# Altium PCB radxa_cm3_io_board_v1360_pcb_layout.PcbDoc (part 7 of 7)
Units mil, origin at the board's own origin, x right, y up, seen from the top; angles counter-clockwise.
Board outline 6299.61 x 3544.09 mil, 4 copper layers (Top, GND, Power, Bottom), stack 35.4 mil thick; 513 components, 397 nets, 1855 pads, 2695 vias.
Unrouted connection lines stored in the file: 280.
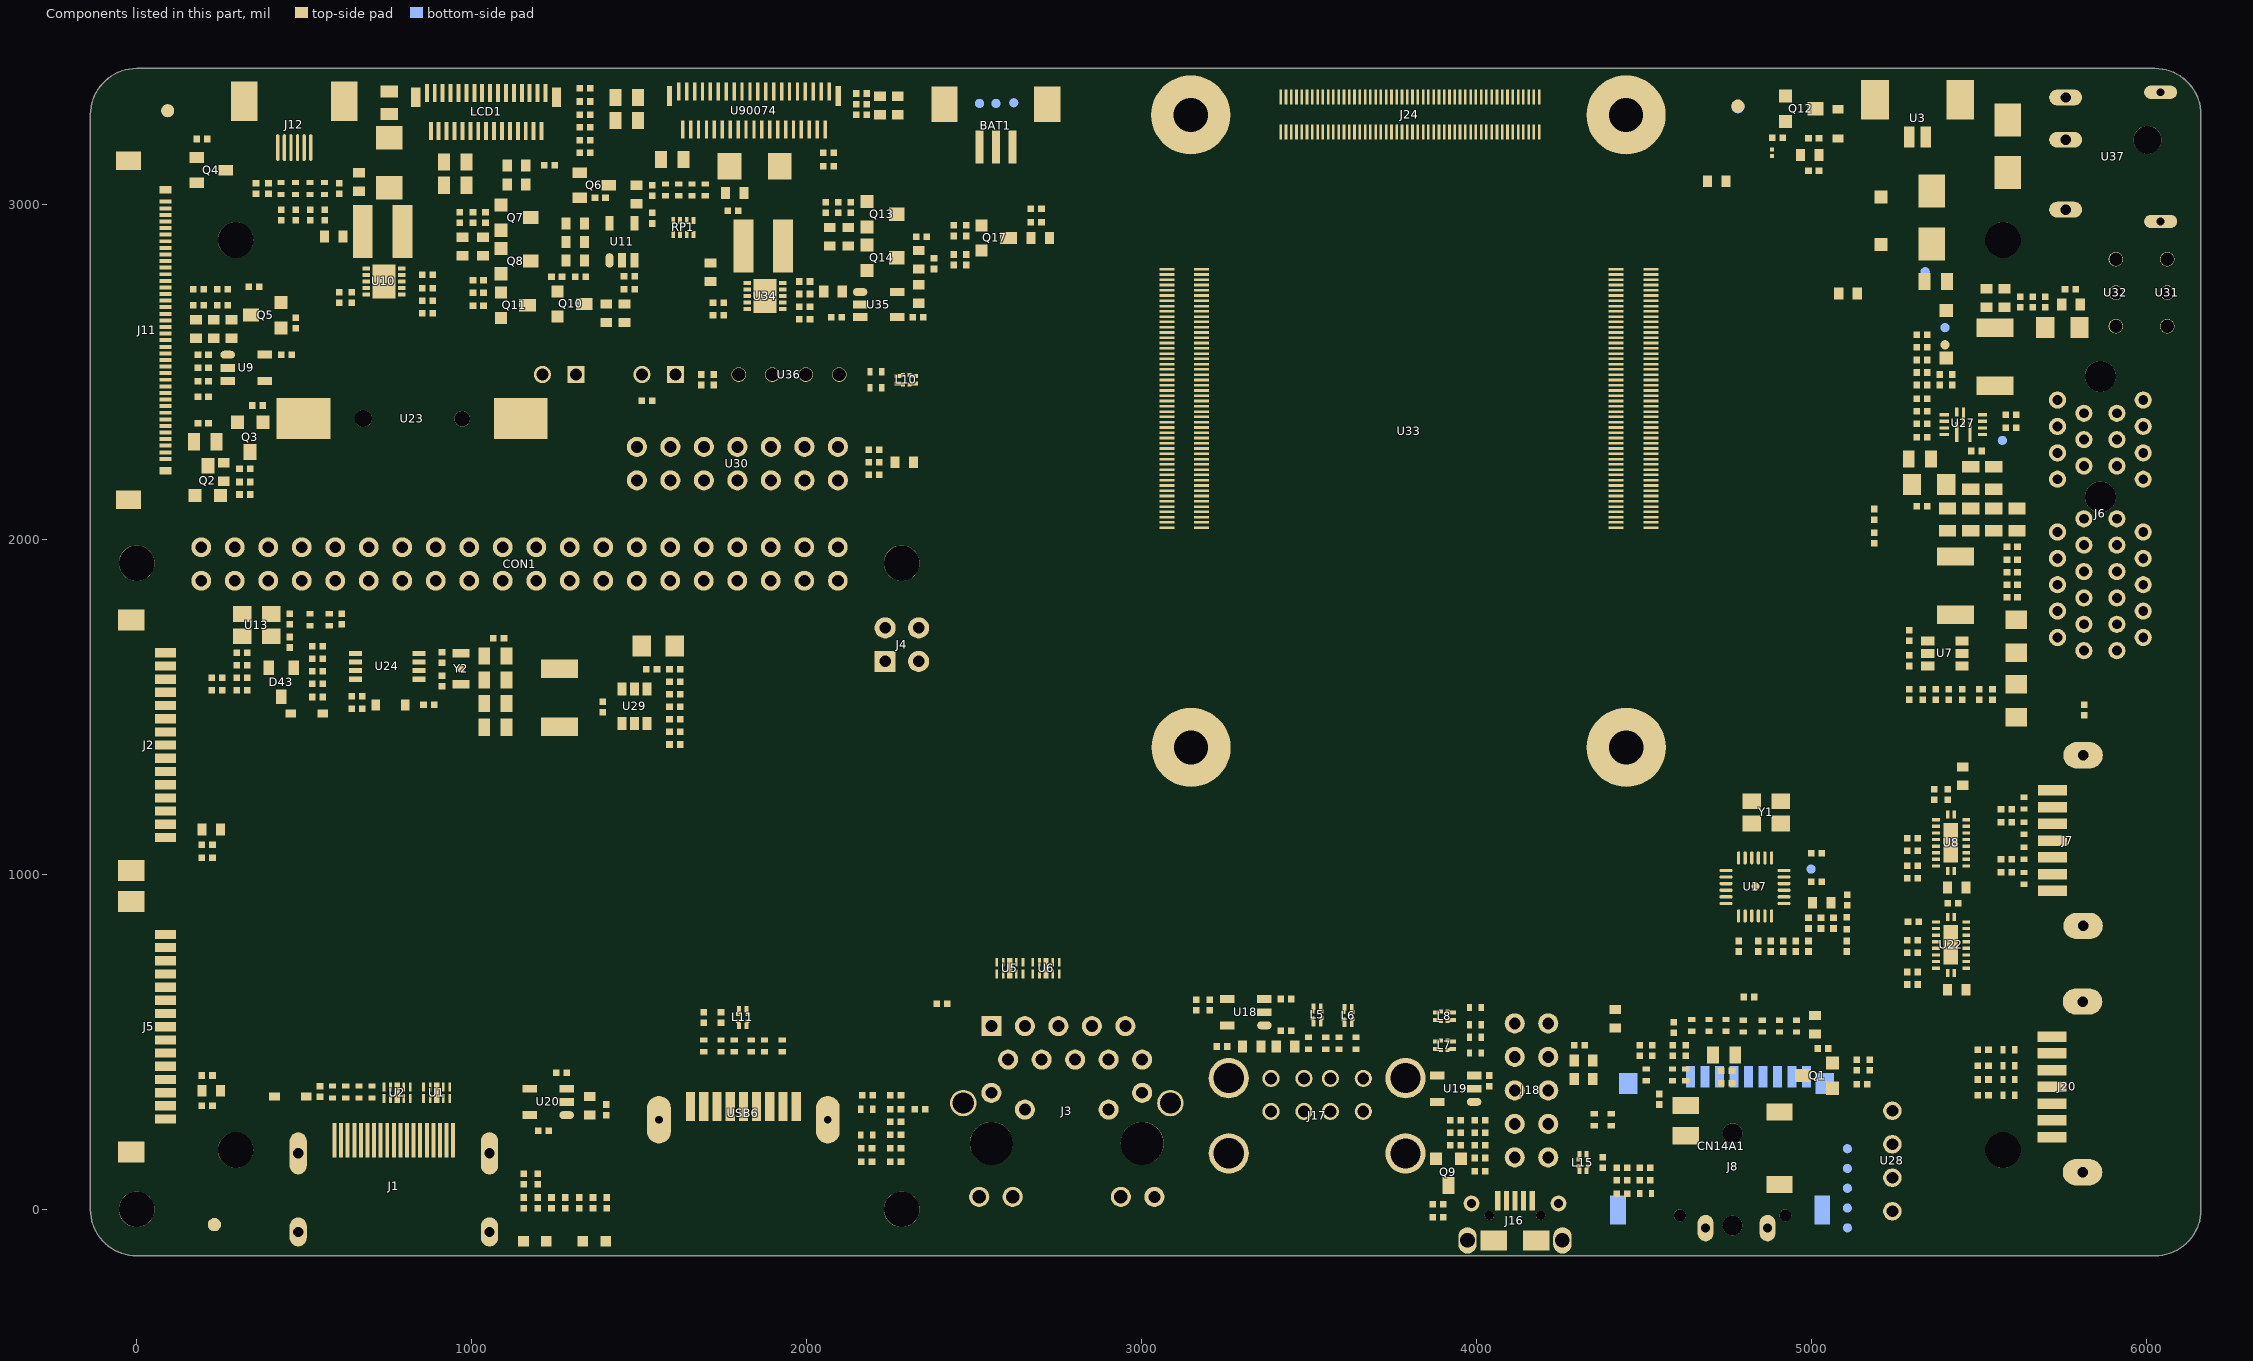
[diagram p9: the components of this part, seen from the top]

## Keep-outs
Top:
  region: 5767.72,1039.37 5757.87,1039.37 5757.87,1009.84 5767.72,1009.84 5767.72,1039.37
  region: 5444.88,2653.54 5647.64,2653.54 5647.64,2409.45 5444.88,2409.45 5444.88,2653.54
  region: 3202.76,2659.45 3218.5,2659.45 3218.5,2496.06 3202.76,2496.06 3202.76,2659.45
  region: 2293.31,2887.8 2395.67,2887.8 2395.67,2903.54 2293.31,2903.54 2293.31,2887.8
  region: 496.06,1706.69 600.39,1706.69 600.39,1698.82 496.06,1698.82 496.06,1706.69
  region: 2653.54,3043.31 2665.35,3043.31 2665.35,2984.25 2653.54,2984.25 2653.54,3043.31
  region: 5466.54,387.8 5476.38,387.8 5476.38,338.58 5466.54,338.58 5466.54,387.8
  region: 1159.45,2856.3 1124.02,2856.3 1124.02,2838.58 1159.45,2838.58 1159.45,2856.3
  region: 1742.13,2998.03 1730.31,2998.03 1730.31,2948.82 1742.13,2948.82 1742.13,2998.03
  region: 5533.46,1043.31 5539.37,1043.31 5539.37,1003.94 5533.46,1003.94 5533.46,1043.31
  region: 1590.55,2946.85 1669.29,2946.85 1669.29,2901.57 1590.55,2901.57 1590.55,2946.85
  region: 277.56,2683.07 320.87,2683.07 320.87,2694.88 277.56,2694.88 277.56,2683.07
  region: 2025.59,2763.78 2011.81,2763.78 2011.81,2665.35 2025.59,2665.35 2025.59,2763.78
  region: 5372.05,1610.24 5364.17,1610.24 5364.17,1564.96 5372.05,1564.96 5372.05,1610.24
  region: 5537.4,1149.61 5629.92,1149.61 5629.92,1139.76 5537.4,1139.76 5537.4,1149.61
  region: 2614.17,3297.24 2480.31,3297.24 2480.31,3279.53 2614.17,3279.53 2614.17,3297.24
  region: 1602.36,2998.03 1696.85,2998.03 1696.85,2980.31 1602.36,2980.31 1602.36,2998.03
  region: 5767.72,1185.04 5757.87,1185.04 5757.87,1159.45 5767.72,1159.45 5767.72,1185.04
  region: 5537.4,2299.21 5582.68,2299.21 5582.68,2303.15 5537.4,2303.15 5537.4,2299.21
  region: 899.61,2783.46 887.8,2783.46 887.8,2759.84 899.61,2759.84 899.61,2783.46
  region: 5332.68,2295.28 5328.74,2295.28 5328.74,2269.68 5332.68,2269.68 5332.68,2295.28
  region: 5295.28,1124.02 5344.49,1124.02 5344.49,1092.52 5295.28,1092.52 5295.28,1124.02
  region: 1291.34,51.18 1352.36,51.18 1352.36,39.37 1291.34,39.37 1291.34,51.18
  region: 4360.24,2096.46 4356.3,2096.46 4356.3,2062.99 4360.24,2062.99 4360.24,2096.46
  region: 4370.08,1659.45 4413.39,1659.45 4413.39,1651.57 4370.08,1651.57 4370.08,1659.45
  region: 198.82,1374.02 911.42,1374.02 911.42,1259.84 198.82,1259.84 198.82,1374.02
  region: 5330.71,2289.37 5411.42,2289.37 5411.42,2293.31 5330.71,2293.31 5330.71,2289.37
  region: 5543.31,505.91 5543.31,484.25 5533.46,484.25 5533.46,505.91 5543.31,505.91
  region: 283.46,1639.76 324.8,1639.76 324.8,1651.57 283.46,1651.57 283.46,1639.76
  region: 5354.33,2507.87 5446.85,2507.87 5446.85,2488.19 5354.33,2488.19 5354.33,2507.87
  region: 62.99,2395.67 110.24,2395.67 110.24,2187.01 62.99,2187.01 62.99,2395.67
  region: 1812.99,3053.15 1960.63,3053.15 1960.63,2791.34 1812.99,2791.34 1812.99,3053.15
  region: 2976.38,2190.94 2980.31,2190.94 2980.31,2157.48 2976.38,2157.48 2976.38,2190.94
  region: 1427.17,2683.07 1421.26,2683.07 1421.26,2618.11 1427.17,2618.11 1427.17,2683.07
  region: 2017.72,3033.46 2230.31,3033.46 2230.31,3017.72 2017.72,3017.72 2017.72,3033.46
  region: 5301.18,1064.96 5311.02,1064.96 5311.02,1007.87 5301.18,1007.87 5301.18,1064.96
  region: 1206.69,2814.96 1198.82,2814.96 1198.82,2795.28 1206.69,2795.28 1206.69,2814.96
  region: 5547.24,3021.65 5490.16,3021.65 5490.16,3029.53 5547.24,3029.53 5547.24,3021.65
  region: 5409.45,2372.05 5425.2,2372.05 5425.2,2326.77 5409.45,2326.77 5409.45,2372.05
  region: 5765.75,303.15 5761.81,303.15 5761.81,275.59 5765.75,275.59 5765.75,303.15
  region: 1767.72,2696.85 1730.31,2696.85 1730.31,2641.73 1767.72,2641.73 1767.72,2696.85
  region: 3045.28,2188.98 3039.37,2188.98 3039.37,2104.33 3045.28,2104.33 3045.28,2188.98
  region: 2297.24,332.68 2287.4,332.68 2287.4,309.06 2297.24,309.06 2297.24,332.68
  region: 5377.95,1531.5 5488.19,1531.5 5488.19,1547.24 5377.95,1547.24 5377.95,1531.5
  region: 1159.45,1641.73 1377.95,1641.73 1377.95,1409.45 1159.45,1409.45 1159.45,1641.73
  region: 437.01,2937.01 590.55,2937.01 590.55,2988.19 437.01,2988.19 437.01,2937.01
  region: 1775.59,3072.83 1781.5,3072.83 1781.5,3047.24 1775.59,3047.24 1775.59,3072.83
  region: 2633.86,767.72 2734.25,767.72 2734.25,781.5 2633.86,781.5 2633.86,767.72
  region: 5549.21,818.9 5541.34,818.9 5541.34,736.22 5549.21,736.22 5549.21,818.9
  region: 5354.33,1116.14 5344.49,1116.14 5344.49,1090.55 5354.33,1090.55 5354.33,1116.14
  region: 1200.79,350.39 1179.13,350.39 1179.13,297.24 1200.79,297.24 1200.79,350.39
  region: 2586.61,767.72 2635.83,767.72 2635.83,779.53 2586.61,779.53 2586.61,767.72
  region: 1291.34,3246.06 1387.8,3246.06 1387.8,3190.94 1291.34,3190.94 1291.34,3246.06
  region: 5295.28,972.44 5381.89,972.44 5381.89,974.41 5295.28,974.41 5295.28,972.44
  region: 1314.96,-9.84 1307.09,-9.84 1307.09,-39.37 1314.96,-39.37 1314.96,-9.84
  region: 3029.53,2710.63 3005.91,2710.63 3005.91,2588.58 3029.53,2588.58 3029.53,2710.63
  region: 692.91,354.33 746.06,354.33 746.06,350.39 692.91,350.39 692.91,354.33
  region: 159.45,2059.06 169.29,2059.06 169.29,1980.31 159.45,1980.31 159.45,2059.06
  region: 3202.76,2328.74 3210.63,2328.74 3210.63,2259.84 3202.76,2259.84 3202.76,2328.74
  region: 3165.35,474.41 3196.85,474.41 3196.85,468.5 3165.35,468.5 3165.35,474.41
  region: 1003.94,2712.6 1143.7,2712.6 1143.7,2728.35 1003.94,2728.35 1003.94,2712.6
  region: 3202.76,2188.98 3206.69,2188.98 3206.69,2161.42 3202.76,2161.42 3202.76,2188.98
  region: 2297.24,2858.27 2287.4,2858.27 2287.4,2897.64 2297.24,2897.64 2297.24,2858.27
  region: 6102.36,1568.9 6017.72,1568.9 6017.72,1553.15 6102.36,1553.15 6102.36,1568.9
  region: 944.88,1326.77 972.44,1326.77 972.44,1285.43 944.88,1285.43 944.88,1326.77
  region: 2759.84,3187.01 2771.65,3187.01 2771.65,3133.86 2759.84,3133.86 2759.84,3187.01
  region: 5301.18,740.16 5314.96,740.16 5314.96,679.13 5301.18,679.13 5301.18,740.16
  region: 769.69,397.64 923.23,397.64 923.23,419.29 769.69,419.29 769.69,397.64
  region: 2978.35,2179.13 3000,2179.13 3000,2169.29 2978.35,2169.29 2978.35,2179.13
  region: 1192.91,2675.2 1234.25,2675.2 1234.25,2681.1 1192.91,2681.1 1192.91,2675.2
  region: 3053.15,2661.42 3027.56,2661.42 3027.56,2566.93 3053.15,2566.93 3053.15,2661.42
  region: 490.16,2204.72 334.65,2204.72 334.65,2181.1 490.16,2181.1 490.16,2204.72
  region: 2812.99,3255.91 2832.68,3255.91 2832.68,3190.94 2812.99,3190.94 2812.99,3255.91
  region: 1000,1275.59 1023.62,1275.59 1023.62,1250 1000,1250 1000,1275.59
  region: 5728.35,2663.39 5767.72,2663.39 5767.72,2649.61 5728.35,2649.61 5728.35,2663.39
  region: 368.11,1757.87 375.98,1757.87 375.98,1732.28 368.11,1732.28 368.11,1757.87
  region: 5326.77,1970.47 5531.5,1970.47 5531.5,1753.94 5326.77,1753.94 5326.77,1970.47
  region: 448.82,1466.54 385.83,1466.54 385.83,1476.38 448.82,1476.38 448.82,1466.54
  region: 2472.44,1246.06 2460.63,1246.06 2460.63,1208.66 2472.44,1208.66 2472.44,1246.06
  region: 677.17,3055.12 783.46,3055.12 783.46,2840.55 677.17,2840.55 677.17,3055.12
  region: 309.06,2437.01 338.58,2437.01 338.58,2446.85 309.06,2446.85 309.06,2437.01
  region: 4234.25,1616.14 4250,1616.14 4250,1539.37 4234.25,1539.37 4234.25,1616.14
  region: 4377.95,897.64 4417.32,897.64 4417.32,885.83 4377.95,885.83 4377.95,897.64
  region: 161.42,1533.46 173.23,1533.46 173.23,1492.13 161.42,1492.13 161.42,1533.46
  region: 2938.98,1.97 3043.31,1.97 3043.31,17.72 2938.98,17.72 2938.98,1.97
  region: 1307.09,3344.49 1338.58,3344.49 1338.58,3303.15 1307.09,3303.15 1307.09,3344.49
  region: 210.63,1576.77 208.66,1576.77 208.66,1553.15 210.63,1553.15 210.63,1576.77
  region: 2141.73,2852.36 2251.97,2852.36 2251.97,2864.17 2141.73,2864.17 2141.73,2852.36
  region: 5767.72,456.69 5763.78,456.69 5763.78,425.2 5767.72,425.2 5767.72,456.69
  region: 5385.83,2257.87 5389.76,2257.87 5389.76,2295.28 5385.83,2295.28 5385.83,2257.87
  region: 3222.44,2757.87 3232.28,2757.87 3232.28,2486.22 3222.44,2486.22 3222.44,2757.87
  region: 273.62,2257.87 320.87,2257.87 320.87,2244.09 273.62,2244.09 273.62,2257.87
  region: 990.16,3305.12 1127.95,3305.12 1127.95,3246.06 990.16,3246.06 990.16,3305.12
  region: 401.57,2464.57 352.36,2464.57 352.36,2366.14 401.57,2366.14 401.57,2464.57
  region: 1848.43,3309.06 1992.13,3309.06 1992.13,3250 1848.43,3250 1848.43,3309.06
  region: 4545.28,328.74 4515.75,328.74 4515.75,338.58 4545.28,338.58 4545.28,328.74
  region: 968.5,1259.84 996.06,1259.84 996.06,1232.28 968.5,1232.28 968.5,1259.84
  region: 5527.56,716.54 5553.15,716.54 5553.15,724.41 5527.56,724.41 5527.56,716.54
  region: 1066.93,500 1102.36,500 1102.36,515.75 1066.93,515.75 1066.93,500
  region: 1730.31,2716.54 1746.06,2716.54 1746.06,2687.01 1730.31,2687.01 1730.31,2716.54
  region: 2942.91,1169.29 2913.39,1169.29 2913.39,1175.2 2942.91,1175.2 2942.91,1169.29
  region: 5403.54,1161.42 5383.86,1161.42 5383.86,1165.35 5403.54,1165.35 5403.54,1161.42
  region: 3155.51,2066.93 3151.57,2066.93 3151.57,2094.49 3155.51,2094.49 3155.51,2066.93
  region: 2669.29,2970.47 2773.62,2970.47 2773.62,2980.31 2669.29,2980.31 2669.29,2970.47
  region: 5490.16,2372.05 5496.06,2372.05 5496.06,2309.06 5490.16,2309.06 5490.16,2372.05
Power:
  region: 1657.15,1500 ccw(c1645.67,1500) 1645.67,1511.48 ccw(c1645.67,1500) 1634.19,1500 ccw(c1645.67,1500) 1645.67,1488.52 ccw(c1645.67,1500)
  region: 3281.5,3377.95 3289.37,3377.95 3289.37,3354.33 3281.5,3354.33 3281.5,3377.95
  region: 3356.3,3301.18 3368.11,3301.18 3368.11,3242.13 3356.3,3242.13 3356.3,3301.18
  region: 5310.45,2305.12 ccw(c5297.24,2305.12) 5297.24,2318.32 ccw(c5297.24,2305.12) 5284.04,2305.12 ccw(c5297.24,2305.12) 5297.24,2291.91 ccw(c5297.24,2305.12)
Bottom:
  region: 2364.17,1627.95 2372.05,1627.95 2372.05,1734.25 2364.17,1734.25 2364.17,1627.95
  region: 5728.35,2718.5 5714.57,2718.5 5714.57,2683.07 5728.35,2683.07 5728.35,2718.5
  region: 74.8,2968.5 47.24,2968.5 47.24,2685.04 74.8,2685.04 74.8,2968.5
  region: 3486.22,1627.95 4165.35,1627.95 4165.35,1562.99 3486.22,1562.99 3486.22,1627.95
  region: 503.94,1614.17 500,1614.17 500,1637.8 503.94,1637.8 503.94,1614.17
  region: 4037.4,2948.82 4086.61,2948.82 4086.61,2954.72 4037.4,2954.72 4037.4,2948.82
  region: 5364.17,1045.28 5350.39,1045.28 5350.39,1155.51 5364.17,1155.51 5364.17,1045.28
  region: 5777.56,2714.57 5793.31,2714.57 5793.31,2669.29 5777.56,2669.29 5777.56,2714.57
  region: 1061.02,3078.74 2966.54,3078.74 2966.54,2862.2 1061.02,2862.2 1061.02,3078.74
  region: 1015.75,3259.84 1137.8,3259.84 1137.8,2996.06 1015.75,2996.06 1015.75,3259.84
  region: 956.69,3194.88 1009.84,3194.88 1009.84,3185.04 956.69,3185.04 956.69,3194.88
  region: 1905.51,3212.6 1964.57,3212.6 1964.57,3169.29 1905.51,3169.29 1905.51,3212.6
  region: 4275.59,3244.09 4305.12,3244.09 4305.12,3250 4275.59,3250 4275.59,3244.09
  region: 1356.3,2694.88 1370.08,2694.88 1370.08,2665.35 1356.3,2665.35 1356.3,2694.88
  region: 4488.19,2738.19 4549.21,2738.19 4549.21,2704.72 4488.19,2704.72 4488.19,2738.19
  region: 3675.2,2897.64 3921.26,2897.64 3921.26,2856.3 3675.2,2856.3 3675.2,2897.64
  region: 3820.87,769.68 3787.4,769.68 3787.4,775.59 3820.87,775.59 3820.87,769.68
  region: 4692.91,899.61 4714.57,899.61 4714.57,907.48 4692.91,907.48 4692.91,899.61
  region: 1988.19,3127.95 2919.29,3127.95 2919.29,3086.61 1988.19,3086.61 1988.19,3127.95
Keep-Out Layer:
  the board outline again, w3.94

## Other copper
Top:
  region net VCC12V_DCIN: 5326.77,2277.56 5171.26,2277.56 5171.26,2080.71 5326.77,2080.71 5326.77,2277.56
  region net VCC5V_P: 1464.57,2795.28 1403.54,2795.28 1403.54,2690.94 1464.57,2690.94 1464.57,2795.28
  region net BAT_3V7_LOSE: 3553.15,3261.81 3590.55,3261.81 3590.55,3342.52 3553.15,3342.52 3553.15,3261.81
  region net VCC12V_DCIN: 5322.83,2561.02 5265.75,2561.02 5265.75,2663.39 5322.83,2663.39 5322.83,2561.02
  region net VCC5V0_USB1: 3342.52,561.02 3425.2,561.02 3425.2,267.72 3342.52,267.72 3342.52,561.02
  region net +5V_INPUT: 5500,2706.69 5379.92,2706.69 5379.92,2647.64 5429.13,2647.64 5476.38,2600.39 5500,2600.39 5500,2706.69
  region net VCC5V_P: 1311.02,2685.04 1474.41,2685.04 1474.41,2716.54 1311.02,2716.54 1311.02,2685.04
  region net N17840574: 5318.9,2990.16 5456.69,2990.16 5523.62,3057.09 5523.62,3139.76 5610.24,3226.38 5807.09,3226.38 5807.09,3368.11 5525.59,3368.11 5492.13,3334.65 5492.13,3143.7 5318.9,3143.7 5318.9,2990.16
  region net VCC3V3_SYS: 2051.18,2891.73 2090.55,2891.73 2090.55,2803.15 2051.18,2803.15 2051.18,2891.73
  region net VCC5V_P: 1360.24,2822.83 1427.17,2822.83 1427.17,2692.91 1360.24,2692.91 1360.24,2822.83
  region net VCC3V3_SYS: 942.91,1167.32 968.5,1167.32 968.5,1127.95 942.91,1127.95 942.91,1167.32
  region net VCC3V3_SD_1: 4791.34,322.83 4748.03,322.83 4748.03,488.19 4791.34,488.19 4791.34,322.83
  region net BAT_3V7_LOSE: 2537.4,3289.37 2578.74,3289.37 2578.74,3120.08 2537.4,3120.08 2537.4,3289.37
  region net VCC12V: 228.35,2187.01 316.93,2187.01 316.93,2094.49 287.4,2064.96 228.35,2064.96 228.35,2187.01
  region net N17840574: 5543.31,3163.39 5625.98,3163.39 5716.54,3253.94 5716.54,3267.72 5543.31,3267.72 5543.31,3163.39
  region net VCC5V0_USB: 3234.25,474.41 3188.98,474.41 3188.98,604.33 3234.25,604.33 3234.25,474.41
  region net VCC3V3_SYS: 992.13,2860.24 950.79,2860.24 950.79,2791.34 992.13,2791.34 992.13,2860.24
  region net VCC5V0_USB: 2106.3,2803.15 2143.7,2803.15 2143.7,2889.76 2106.3,2889.76 2106.3,2803.15
  region net N18110264: 5108.27,417.32 5037.4,417.32 5037.4,539.37 5108.27,539.37 5108.27,417.32
  region net USB_5V_IN: 3466.54,3364.17 3425.2,3364.17 3425.2,3261.81 3466.54,3261.81 3466.54,3364.17
  region net VCC5V0_USB: 3931.1,253.94 3854.33,253.94 3854.33,336.61 3931.1,336.61 3931.1,253.94
  region net N19638712: 1379.92,1505.91 1462.6,1505.91 1462.6,1547.24 1379.92,1547.24 1379.92,1505.91
  region net N17923771: 594.49,3041.34 622.05,3041.34 635.83,3055.12 704.72,3055.12 704.72,2840.55 671.26,2840.55 663.39,2832.68 663.39,2801.18 669.29,2795.28 694.88,2795.28 694.88,2783.46 620.08,2783.46 594.49,2809.06 594.49,3041.34
  region net BAT_3V7_PLUS: 3505.91,3342.52 3543.31,3342.52 3543.31,3261.81 3505.91,3261.81 3505.91,3342.52
  region net +5V_INPUT: 4498.03,2716.54 4620.08,2716.54 4620.08,2629.92 4498.03,2629.92 4498.03,2716.54
  region net N19323495: 5458.66,2334.65 5446.85,2334.65 5446.85,2480.31 5458.66,2492.13 5639.76,2492.13 5639.76,2409.45 5484.25,2409.45 5458.66,2383.86 5458.66,2334.65
  region net VCC12V_LCD: 68.9,2324.8 108.27,2324.8 141.73,2358.27 192.91,2358.27 192.91,2257.87 198.82,2251.97 279.53,2251.97 279.53,2194.88 124.02,2194.88 116.14,2202.76 116.14,2246.06 108.27,2253.94 68.9,2253.94 68.9,2324.8
  region net VCC5V0_USB: 641.73,3078.74 685.04,3078.74 685.04,3145.67 641.73,3145.67 641.73,3078.74
  region net VCC3V3_SYS: 5070.87,2994.09 5116.14,2994.09 5116.14,3039.37 5070.87,3039.37 5070.87,2994.09
  region net VCC_LCD_MIPI: 1147.64,2938.98 1147.64,3147.64 1155.51,3155.51 1194.88,3155.51 1202.76,3163.39 1202.76,3248.03 1214.57,3259.84 1214.57,3360.24 1232.28,3360.24 1232.28,2938.98 1147.64,2938.98
  region net VCC5V0_USB2: 4053.15,336.61 3954.72,336.61 3954.72,309.06 3968.5,295.28 4023.62,295.28 4031.5,303.15 4053.15,303.15 4053.15,336.61
  region net +3V3: 4438.98,2677.17 4336.61,2677.17 4336.61,2698.82 4438.98,2698.82 4438.98,2677.17
  region net VCC_LEDK1: 942.91,3360.24 907.48,3360.24 907.48,3265.75 917.32,3255.91 917.32,3185.04 893.7,3161.42 893.7,3029.53 954.72,3029.53 954.72,3293.31 942.91,3305.12 942.91,3360.24
  region net VCC_1V8_1: 1318.9,2978.35 1423.23,2978.35 1423.23,2870.08 1318.9,2870.08 1318.9,2978.35
  region net 5V0_USB30: 1710.63,253.94 1679.13,253.94 1669.29,244.09 1635.83,244.09 1620.08,228.35 1620.08,188.98 1608.27,177.17 1541.34,177.17 1423.23,295.28 1366.14,295.28 1366.14,216.54 1399.61,216.54 1498.03,118.11 1671.26,118.11 1710.63,157.48 1710.63,253.94
  region net VCC3V3_SYS: 224.41,1907.48 159.45,1907.48 159.45,1854.33 131.89,1826.77 70.87,1826.77 55.12,1811.02 55.12,1765.75 165.35,1765.75 224.41,1824.8 224.41,1907.48
  region net VCC12V_DCIN: 5283.46,2261.81 5171.26,2261.81 5171.26,2933.07 5283.46,2933.07 5283.46,2261.81
  region net N17923199: 954.72,2925.2 1055.12,2925.2 1055.12,2885.83 954.72,2885.83 954.72,2925.2
  region net N17810979: 5785.43,1694.88 5838.58,1694.88 5838.58,1496.06 5785.43,1496.06 5785.43,1694.88
  region net VCC5V0_USB: 1149.61,202.76 1210.63,202.76 1210.63,295.28 1149.61,295.28 1149.61,202.76
  region net VCC12V: 5429.13,1673.23 5486.22,1673.23 5509.84,1696.85 5645.67,1696.85 5685.04,1736.22 5763.78,1736.22 5763.78,1539.37 5488.19,1539.37 5488.19,1631.89 5474.41,1645.67 5429.13,1645.67 5429.13,1673.23
  region net +5V_INPUT: 5490.16,2600.39 5724.41,2600.39 5724.41,2706.69 5490.16,2706.69 5490.16,2600.39
  region net VCC3V3_SD_1: 4757.87,488.19 5027.56,488.19 5027.56,379.92 4757.87,379.92 4757.87,488.19
  region net VCC3V3_SYS: 1084.65,1409.45 1366.14,1409.45 1366.14,1480.31 1084.65,1480.31 1084.65,1409.45
  region net USB_5V_IN: 4730.31,3051.18 4803.15,3051.18 4803.15,3106.3 4730.31,3106.3 4730.31,3051.18
  region net N17923199: 992.13,2954.72 1108.27,2954.72 1108.27,2901.57 992.13,2901.57 992.13,2954.72
  region net VCC_LEDA1: 895.67,3360.24 895.67,3263.78 883.86,3251.97 883.86,3163.39 694.88,3163.39 694.88,3287.4 805.12,3287.4 812.99,3279.53 852.36,3279.53 856.3,3283.46 856.3,3360.24 895.67,3360.24
  region net N17840574: 5318.9,3106.3 5318.9,3147.64 5374.02,3147.64 5374.02,3240.16 5488.19,3240.16 5500,3251.97 5513.78,3251.97 5513.78,3106.3 5318.9,3106.3
  region net N17813952: 5374.02,1803.15 5374.02,1683.07 5482.28,1683.07 5509.84,1710.63 5509.84,1803.15 5374.02,1803.15
  region net VCC12V_DCIN: 5352.36,2627.95 5261.81,2627.95 5261.81,2929.13 5352.36,2929.13 5352.36,2627.95
  region net VBUS: 4015.75,124.02 4070.87,124.02 4070.87,7.87 4015.75,7.87 4015.75,124.02
  region net VCC_LEDK2: 1462.6,3346.46 1462.6,3222.44 1515.75,3222.44 1515.75,3346.46 1462.6,3346.46
  region net N17929106: 1781.5,3053.15 1840.55,3053.15 1840.55,2929.13 1781.5,2929.13 1781.5,3053.15
  region net N17841777: 661.42,1543.31 726.38,1543.31 726.38,1484.25 661.42,1484.25 661.42,1543.31
  region net N17923777: 781.5,2783.46 832.68,2783.46 832.68,3084.65 714.57,3084.65 714.57,3013.78 761.81,2966.54 761.81,2840.55 781.5,2820.87 781.5,2783.46
  region net +5V_INPUT: 1500,1533.46 1472.44,1533.46 1472.44,1647.64 1466.54,1653.54 1403.54,1653.54 1403.54,1714.57 1535.43,1714.57 1535.43,1608.27 1500,1572.83 1500,1533.46
  region net VCC5V0_USB2: 4307.09,368.11 4255.91,368.11 4255.91,486.22 4218.5,523.62 4102.36,523.62 4082.68,543.31 4082.68,588.58 4232.28,588.58 4301.18,519.68 4301.18,474.41 4307.09,468.5 4307.09,368.11
  region net VCC3V3_SYS: 1084.65,1718.5 1159.45,1718.5 1159.45,1409.45 1084.65,1409.45 1084.65,1718.5
  region net 5V0_USB30: 1259.84,295.28 1259.84,216.54 1421.26,216.54 1423.23,214.57 1423.23,295.28 1259.84,295.28
  region net VCC3V3_SD_1: 5027.56,539.37 4990.16,539.37 4990.16,437.01 5027.56,437.01 5027.56,539.37
  region net +1V8: 4438.98,2708.66 4336.61,2708.66 4336.61,2730.31 4438.98,2730.31 4438.98,2708.66
  region net VCC3V3_LCD0: 303.15,2537.4 228.35,2537.4 228.35,2500 202.76,2500 202.76,2572.83 192.91,2582.68 131.89,2582.68 108.27,2606.3 70.87,2606.3 70.87,2681.1 125.98,2681.1 133.86,2673.23 133.86,2639.76 145.67,2627.95 303.15,2627.95 303.15,2537.4
  region net N17929106: 1694.88,2809.06 1767.72,2809.06 1777.56,2799.21 1777.56,2746.06 1783.46,2740.16 1832.68,2740.16 1832.68,2751.97 1809.06,2751.97 1803.15,2757.87 1803.15,2781.5 1811.02,2789.37 1840.55,2789.37 1840.55,3043.31 1781.5,3043.31 1781.5,2960.63 1775.59,2954.72 1706.69,2954.72 1694.88,2942.91 1694.88,2809.06
  region net VCC5V0_USB: 1015.75,2198.82 1163.39,2198.82 1163.39,2139.76 1015.75,2139.76 1015.75,2198.82
  region net VCC12V: 5438.98,2350.39 5427.17,2350.39 5427.17,2303.15 5391.73,2267.72 5391.73,2220.47 5372.05,2200.79 5372.05,2129.92 5435.04,2129.92 5435.04,2181.1 5442.91,2188.98 5586.61,2188.98 5586.61,2244.09 5496.06,2244.09 5486.22,2253.94 5486.22,2275.59 5456.69,2275.59 5438.98,2293.31 5438.98,2350.39
  region net GND: 3271.65,1450.79 3202.76,1450.79 3202.76,1312.99 3271.65,1312.99 3271.65,1450.79
  region net VCC5V0_USB: 5771.65,2598.43 5866.14,2598.43 5866.14,2757.87 5771.65,2757.87 5771.65,2598.43
  region net N17929067: 2051.18,2944.88 2200.79,2944.88 2200.79,2911.42 2051.18,2911.42 2051.18,2944.88
  region net VCC_LCD_MIPI_2: 2244.09,2950.79 2309.06,2950.79 2309.06,3281.5 2244.09,3281.5 2244.09,2950.79
  region net VBUS: 4482.28,570.87 4521.65,570.87 4521.65,519.68 4482.28,519.68 4482.28,570.87
  region net VCC3V3_LCD0: 104.33,2681.1 66.93,2681.1 66.93,2606.3 104.33,2606.3 104.33,2681.1
  region net VCC5V_P: 1318.9,2858.27 1427.17,2858.27 1427.17,2809.06 1318.9,2809.06 1318.9,2858.27
  region net VCC5V0_USB: 3188.98,604.33 3279.53,604.33 3279.53,535.43 3188.98,535.43 3188.98,604.33
  region net N19638712: 1462.6,1533.46 1206.69,1533.46 1206.69,1643.7 1462.6,1643.7 1462.6,1533.46
  region net VCC12V_DCIN: 5645.67,3143.7 5543.31,3143.7 5543.31,3027.56 5700.79,3027.56 5700.79,3088.58 5645.67,3143.7
  region net VCC5V_P: 2092.52,2763.78 2198.82,2763.78 2198.82,2722.44 2092.52,2722.44 2092.52,2763.78
  region net VCC5V0_USB: 1011.81,2860.24 1053.15,2860.24 1053.15,2791.34 1011.81,2791.34 1011.81,2860.24
  region net VCC5V0_USB: 1694.88,2785.43 1765.75,2785.43 1765.75,2744.09 1694.88,2744.09 1694.88,2785.43
  region net N17929109: 1919.29,2740.16 1919.29,2779.53 1907.48,2791.34 1895.67,2791.34 1895.67,2911.42 1850.39,2956.69 1850.39,3153.54 1960.63,3153.54 1960.63,2740.16 1919.29,2740.16
  region net VCC3V3_SYS: 90.55,1029.53 33.46,1029.53 33.46,956.69 90.55,956.69 90.55,1029.53
  region net BAT_3V7_PLUS: 2598.43,3291.34 2637.8,3291.34 2637.8,3122.05 2598.43,3122.05 2598.43,3291.34
  region net N19638714: 1375.98,1494.09 1462.6,1494.09 1462.6,1409.45 1375.98,1409.45 1375.98,1494.09
  region net N17929067: 2120.08,2978.35 2200.79,2978.35 2200.79,2911.42 2120.08,2911.42 2120.08,2978.35
  region net VCC5V0_USB: 1421.26,2663.39 1236.22,2663.39 1236.22,2625.98 1421.26,2625.98 1421.26,2663.39
  region net 5V0_USB30: 1710.63,352.36 1675.2,352.36 1675.2,224.41 1710.63,224.41 1710.63,352.36
  region net VCC_LEDA2: 1624.02,3364.17 1624.02,3285.43 1635.83,3273.62 1635.83,3190.94 1669.29,3157.48 1805.12,3157.48 1805.12,3074.8 1720.47,3074.8 1687.01,3108.27 1604.33,3108.27 1594.49,3118.11 1594.49,3267.72 1612.2,3285.43 1612.2,3364.17 1624.02,3364.17
  region net VCC3V3_PCIE: 5372.05,2051.18 5561.02,2051.18 5561.02,1921.26 5372.05,1921.26 5372.05,2051.18
  region net N17929067: 2082.68,2984.25 2143.7,2984.25 2143.7,2925.2 2082.68,2925.2 2082.68,2984.25
  region net VCC3V3_SYS: 440.94,2537.4 326.77,2537.4 326.77,2610.24 395.67,2610.24 409.45,2596.46 440.94,2596.46 440.94,2537.4
  region net VCC5V0_USB: 1236.22,2685.04 1303.15,2685.04 1303.15,2631.89 1236.22,2631.89 1236.22,2685.04
  region net VCC12V_DCIN: 5413.39,2933.07 5181.1,2933.07 5181.1,2812.99 5413.39,2812.99 5413.39,2933.07
  region net VCC_LCD_MIPI_2: 2273.62,3281.5 2074.8,3281.5 2074.8,3305.12 2059.06,3305.12 2059.06,3273.62 2096.46,3236.22 2228.35,3236.22 2263.78,3200.79 2273.62,3200.79 2273.62,3281.5
Power:
  region net USB_5V_IN: 4755.91,3122.05 4755.91,3049.21 4801.18,3049.21 4801.18,3122.05 4755.91,3122.05
  region net VCC5V0_USB: 1728.35,2767.72 1767.72,2767.72 1767.72,2746.06 1728.35,2746.06 1728.35,2767.72
  region net VCC12V: 5694.88,1748.03 5767.72,1748.03 5767.72,1665.35 5694.88,1665.35 5694.88,1748.03
  region net VCC5V0_USB: 159.45,2015.75 332.68,2015.75 332.68,1937.01 159.45,1937.01 159.45,2015.75
  region net VCC5V0_USB: 2106.3,2840.55 2145.67,2840.55 2145.67,2812.99 2106.3,2812.99 2106.3,2840.55
  region net BAT_3V7_LOSE: 2537.4,3275.59 2576.77,3275.59 2576.77,3248.03 2537.4,3248.03 2537.4,3275.59
Bottom:
  region net VCC5V0_USB: 1124.02,2177.17 1163.39,2177.17 1163.39,2147.64 1124.02,2147.64 1124.02,2177.17
  region net GND: 3273.62,3289.37 3273.62,3220.47 3200.79,3147.64 3088.58,3147.64 3015.75,3220.47 3015.75,3289.37 3273.62,3289.37
  region net VCC5V0_USB: 1011.81,2183.07 1051.18,2183.07 1051.18,2149.61 1011.81,2149.61 1011.81,2183.07
  region net BAT_3V7_PLUS: 2598.43,3255.91 2639.76,3255.91 2639.76,3316.93 2598.43,3316.93 2598.43,3255.91
  region net VCC3V3_SYS: 1084.65,1696.85 1127.95,1696.85 1127.95,1460.63 1084.65,1460.63 1084.65,1696.85
  region net VCC12V_DCIN: 5702.76,3027.56 5517.72,3027.56 5437.01,2946.85 5437.01,2830.71 5242.13,2830.71 5242.13,3003.94 5377.95,3139.76 5649.61,3139.76 5702.76,3086.61 5702.76,3027.56
  region net TR0: 2277.56,421.26 2299.21,421.26 2299.21,385.83 2277.56,385.83 2277.56,421.26
  region net VCC5V0_USB: 592.52,2187.01 592.52,2143.7 631.89,2143.7 631.89,2187.01 592.52,2187.01
  region net VCC_LEDK2: 1462.6,3334.65 1685.04,3334.65 1685.04,3238.19 1462.6,3238.19 1462.6,3334.65
  region net VCC12V: 5748.03,1537.4 5937.01,1537.4 5937.01,1624.02 5748.03,1624.02 5748.03,1537.4
  region net USB_5V_IN: 4814.96,3049.21 4759.84,3049.21 4759.84,3108.27 4814.96,3108.27 4814.96,3049.21
  region net VCC5V0_USB: 5844.49,2679.13 5783.46,2679.13 5783.46,2631.89 5824.8,2590.55 5827.76,2593.5 5866.14,2593.5 5866.14,2657.48 5844.49,2679.13
  region net VCC5V_P: 2185.04,2763.78 2210.63,2763.78 2210.63,2724.41 2185.04,2724.41 2185.04,2763.78
  region net BAT_3V7_LOSE: 2537.4,3253.94 2578.74,3253.94 2578.74,3316.93 2537.4,3316.93 2537.4,3253.94
  region net GND: 3021.65,3381.89 3096.46,3381.89 3096.46,3218.5 3021.65,3218.5 3021.65,3381.89
  region net VCC12V: 5391.73,2275.59 5452.76,2275.59 5452.76,2194.88 5391.73,2194.88 5391.73,2275.59
  region net TR3: 2427.17,462.6 2448.82,462.6 2448.82,427.17 2427.17,427.17 2427.17,462.6
  region net VCC3V3_SD_1: 4751.97,429.13 4787.4,429.13 4787.4,322.83 4751.97,322.83 4751.97,429.13
  region net +5V_INPUT: 4545.28,2704.72 4657.48,2704.72 4657.48,2610.24 4545.28,2610.24 4545.28,2704.72
  region net VCC5V0_USB: 657.48,3145.67 683.07,3145.67 683.07,3106.3 657.48,3106.3 657.48,3145.67
  region net VCC_LCD_MIPI_2: 2096.46,3269.68 2057.09,3269.68 2057.09,3311.02 2023.62,3344.49 2055.12,3344.49 2055.12,3342.52 2096.46,3301.18 2096.46,3269.68
  region net 5V0_USB30: 1675.2,267.72 1710.63,267.72 1710.63,226.38 1675.2,226.38 1675.2,267.72
  region net GND: 3057.09,3397.64 3273.62,3397.64 3273.62,3238.19 3057.09,3238.19 3057.09,3397.64
  region net VCC5V0_USB: 1383.86,2663.39 1346.46,2663.39 1346.46,2624.02 1383.86,2624.02 1383.86,2663.39
  region net VCC5V0_USB2: 3968.5,295.28 4025.59,295.28 4049.21,318.9 4049.21,511.81 4057.09,519.68 4244.09,519.68 4244.09,586.61 4003.94,586.61 3984.25,566.93 3984.25,344.49 3976.38,336.61 3954.72,336.61 3954.72,309.06 3968.5,295.28
  region net +5V_INPUT: 5722.44,2688.98 5501.97,2688.98 5501.97,2610.24 5722.44,2610.24 5722.44,2688.98
  region net VCC5V0_USB: 1011.81,2830.71 1051.18,2830.71 1051.18,2799.21 1011.81,2799.21 1011.81,2830.71
  region net USB_5V_IN: 3425.2,3364.17 3466.54,3364.17 3466.54,3261.81 3425.2,3261.81 3425.2,3364.17
  region net VCC12V: 5706.69,1732.28 5765.75,1732.28 5765.75,1537.4 5706.69,1537.4 5706.69,1732.28
  region net VCC12V: 5421.26,2194.88 5584.65,2194.88 5584.65,2250 5421.26,2250 5421.26,2194.88
  region net VCC5V_P: 1395.67,2724.41 1362.2,2724.41 1362.2,2685.04 1395.67,2685.04 1395.67,2724.41
  region net VCC5V0_USB: 1736.22,2783.46 1767.72,2783.46 1767.72,2744.09 1736.22,2744.09 1736.22,2783.46
GND (plane layer: these items are gaps in the copper):
  lines w3.94: -155.51,-157.48 6181.1,-157.48 6181.1,3423.23 -155.51,3423.23 -155.51,-157.48
Multi-Layer:
  lines w3.94: 5970.47,3163.39 5970.47,3222.44 6031.5,3222.44 6031.5,3163.39 5970.47,3163.39

## Silkscreen, mask and mechanical layers (free items; w line width, h text height)
Silkscreen Top:
  drawing of 39800 lines, arcs and shapes, not listed
  text "FAN" at 5537.4,3336.61 h23.62
  text "TP_1" at 251.97,3257.87 h23.62 r90
  text "EDP_LCD" at -21.65,3202.76 h23.62 r90
  text "BAT_3V7" at 2828.74,3188.98 h23.62 r90
  text "MIPI_LCD_1" at 1066.93,3153.54 h19.68
  text "GND" at 5234.25,3116.14 h23.62
  text "5V" at 5332.68,3116.14 h23.62
  text "Connector3" at 3690.94,3110.24 h23.62
  text "MIPI_LCD_2" at 1964.57,3045.28 h23.62
  text "TS" at 2523.62,3035.43 h23.62 r90
  text "BAT-" at 2580.71,3011.81 h23.62 r90
  text "BAT+" at 2641.73,3009.84 h23.62 r90
  text "12V_DC" at 5706.69,2891.73 h23.62
  text "input" at 5724.41,2838.58 h23.62
  text "BAT_RTC" at 551.18,2673.23 h23.62 r90
  text "5V" at 2116.14,2576.77 h23.62 r90
  text "DP" at 1911.42,2572.83 h23.62 r90
  text "DM" at 2011.81,2572.83 h23.62 r90
  text "SPK" at 1230.31,2557.09 h23.62
  text "MIC" at 1535.43,2557.09 h23.62
  text "GND" at 1809.06,2555.12 h23.62 r90
  text "USB2.0" at 2171.26,2541.34 h23.62
  text "Connector1" at 4342.52,2368.11 h23.62 r90
  text "Connector2" at 3273.62,2352.36 h23.62 r90
  text "GND" at 2005.91,2342.52 h23.62 r90
  text "Power_Key" at 2275.59,2287.4 h23.62
  text "Recovery" at 1253.94,2265.75 h23.62
  text "GND" at 1354.33,2163.39 h23.62
  text "PCIE_x1" at 6096.46,2037.4 h23.62 r90
  text "GND" at 409.45,2017.72 h19.68 r90
  text "TX" at 505.91,2017.72 h19.68 r90
  text "RX" at 604.33,2017.72 h19.68 r90
  text "POE" at 2253.94,1492.13 h23.62
  text "Camera_1" at 224.41,1269.68 h23.62 r90
  text "ROCK3 Compute Module IO Board" at 3153.54,893.7 h49.21
  text "5V" at 4094.49,824.8 h23.62
  text "5V" at 4198.82,824.8 h23.62
  text "SATA2" at 5643.7,795.28 h23.62 r90
  text "V1.36" at 3811.02,785.43 h39.37
  text "DM" at 4094.49,777.56 h23.62
  text "DM" at 4198.82,777.56 h23.62
  text "DP" at 4094.49,732.28 h23.62
  text "DP" at 4198.82,732.28 h23.62
  text "GND" at 4074.8,685.04 h23.62
  text "GND" at 4179.13,681.1 h23.62
  text "Ethernet" at 2856.3,649.61 h23.62
  text "NC" at 4090.55,631.89 h23.62
  text "NC" at 4192.91,627.95 h23.62
  text "SATA1" at 5645.67,561.02 h23.62 r90
  text "External_USB" at 4324.8,541.34 h23.62 r90
  text "USB2.0" at 3753.94,474.41 h23.62 r90
  text "USB3.0" at 1421.26,440.94 h23.62
  text "Camera_2" at 222.44,437.01 h23.62 r90
  text "Ext_PSU" at 5226.38,387.8 h23.62
  text "PHONE" at 4818.9,348.43 h23.62
  text "12V" at 5368.11,279.53 h23.62
  text "HDMI" at 444.88,255.91 h23.62
  text "GND" at 5368.11,177.17 h23.62
  text "GND" at 5368.11,76.77 h23.62
  text "5V" at 5379.92,-19.69 h23.62
  text "USB_OTG" at 4324.8,-104.33 h23.62
Silkscreen Bottom:
  text "TF" at 4562.99,464.57 h23.62
Drill Drawing:
  lines w3.94: 5970.47,3163.39 5970.47,3222.44 6031.5,3222.44 6031.5,3163.39 5970.47,3163.39
Layer_103:
  drawing of 25203 lines, arcs and shapes, not listed
Layer_104:
  lines w1: 2368.11,622.05 2368.11,3393.7 5251.97,3393.7 5251.97,622.05 2368.11,622.05